# Altium PCB SPItoLVDS.PcbDoc
Units mil, origin at the board's own origin, x right, y up, seen from the top; angles counter-clockwise.
Board outline 1600 x 755 mil, 4 copper layers (L1, L2, L3, L4), stack 64.602 mil thick; 18 components, 22 nets, 115 pads, 31 vias.
Unrouted connection lines stored in the file: 20.
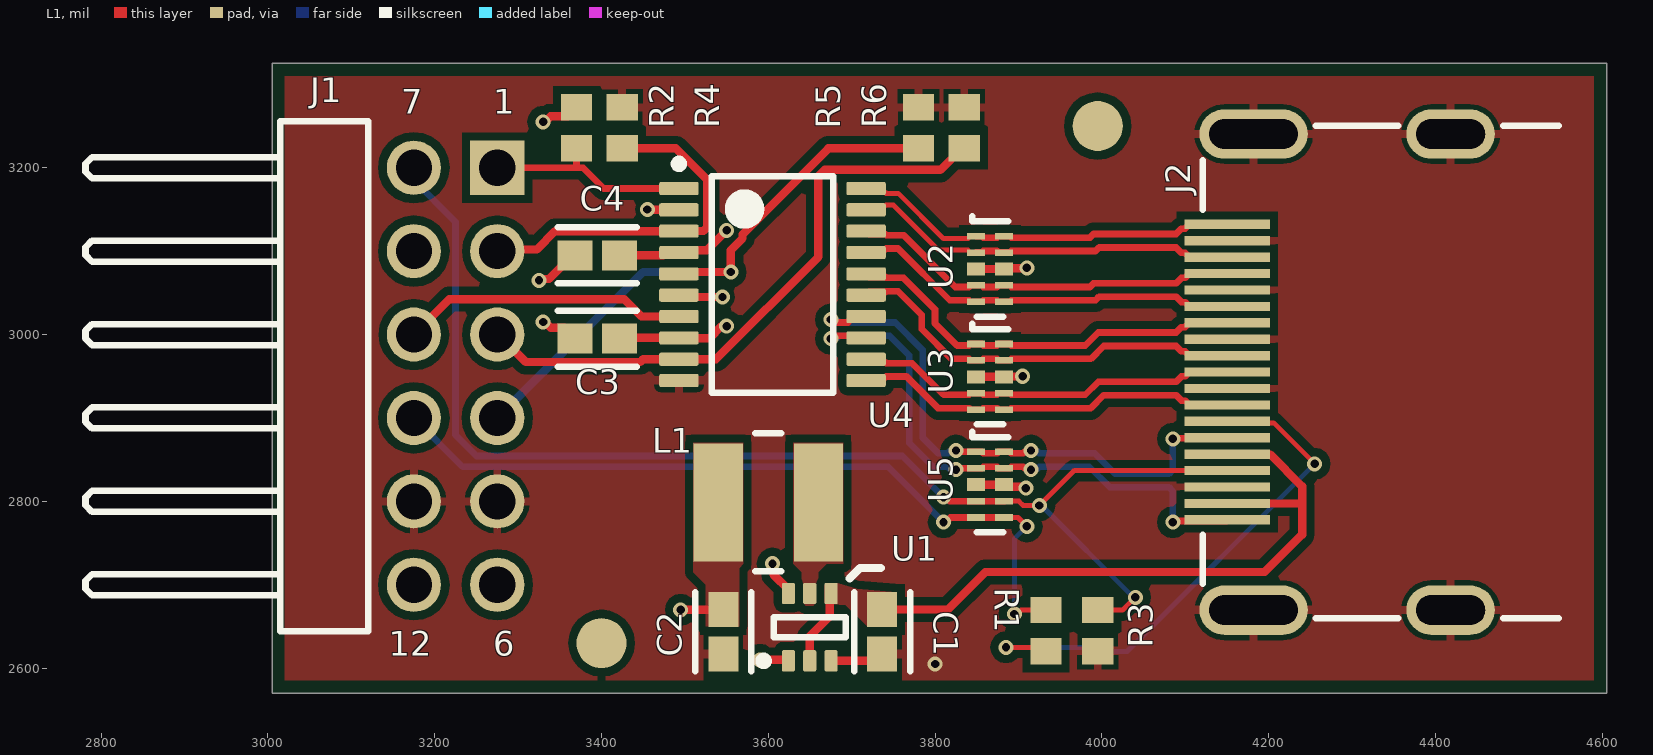
[diagram p0: L1 view]
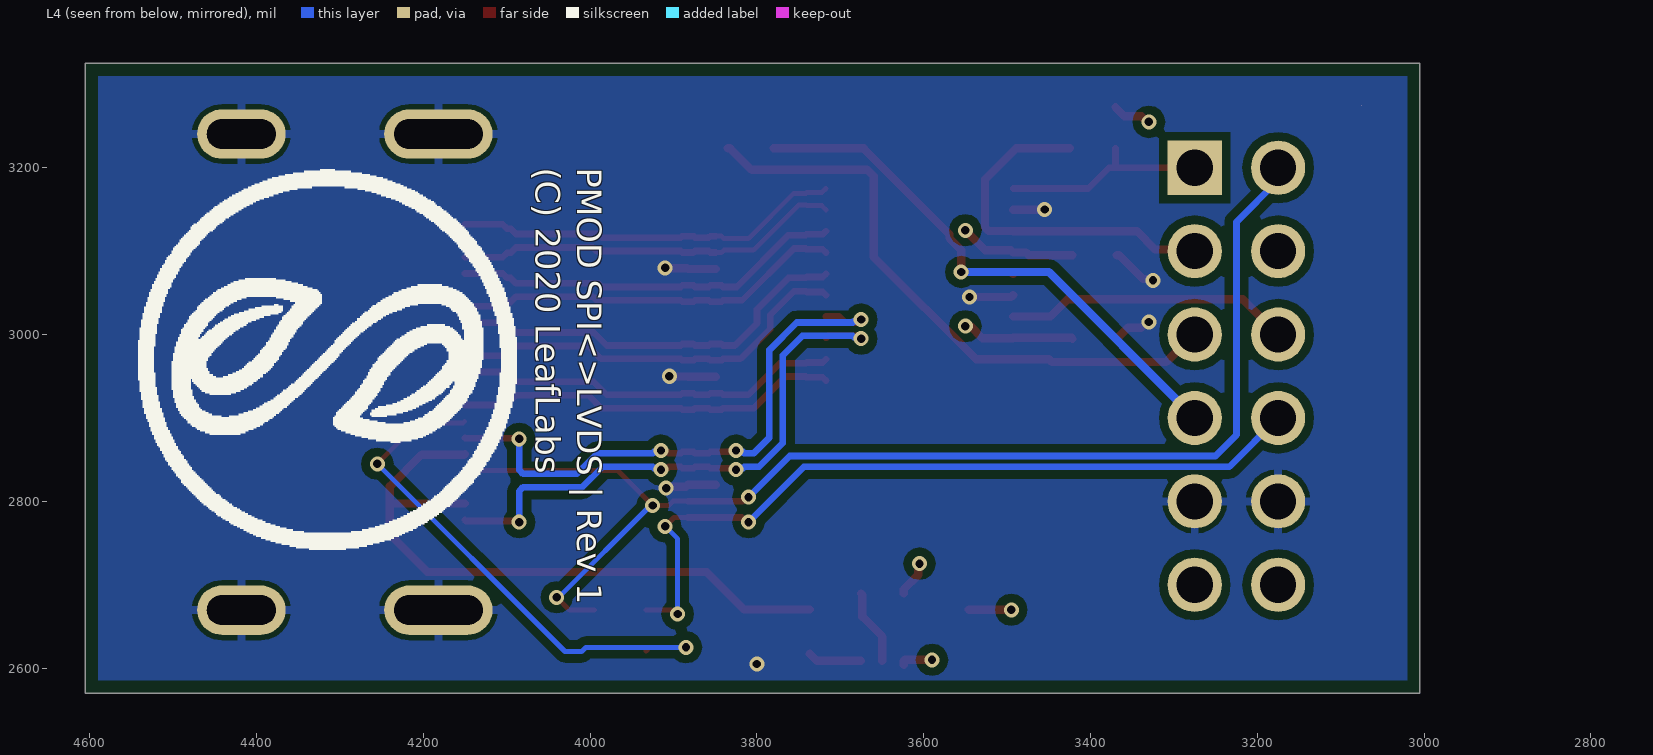
[diagram p1: L4 view, seen from below]
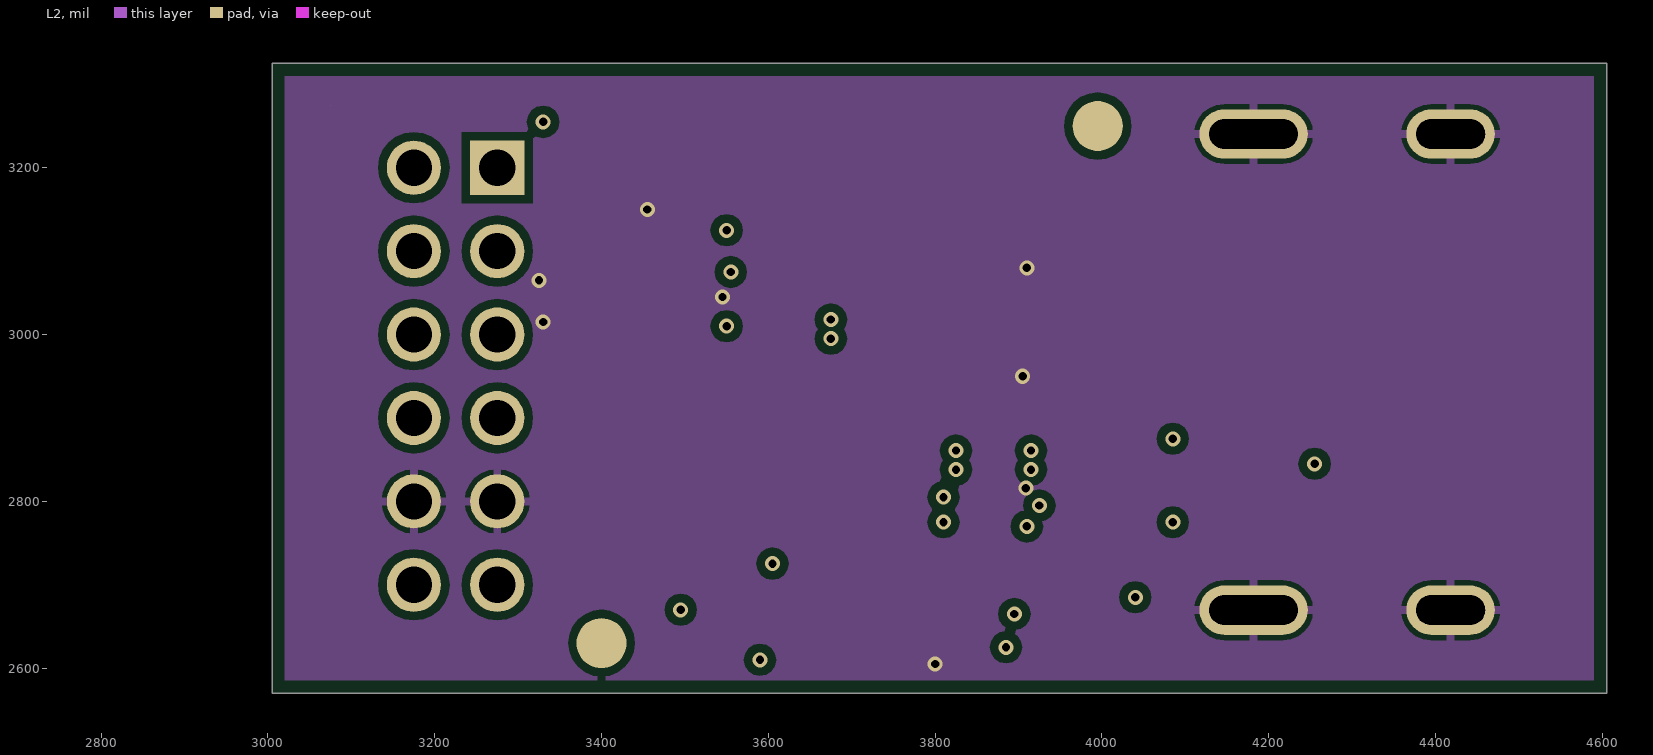
[diagram p2: L2]
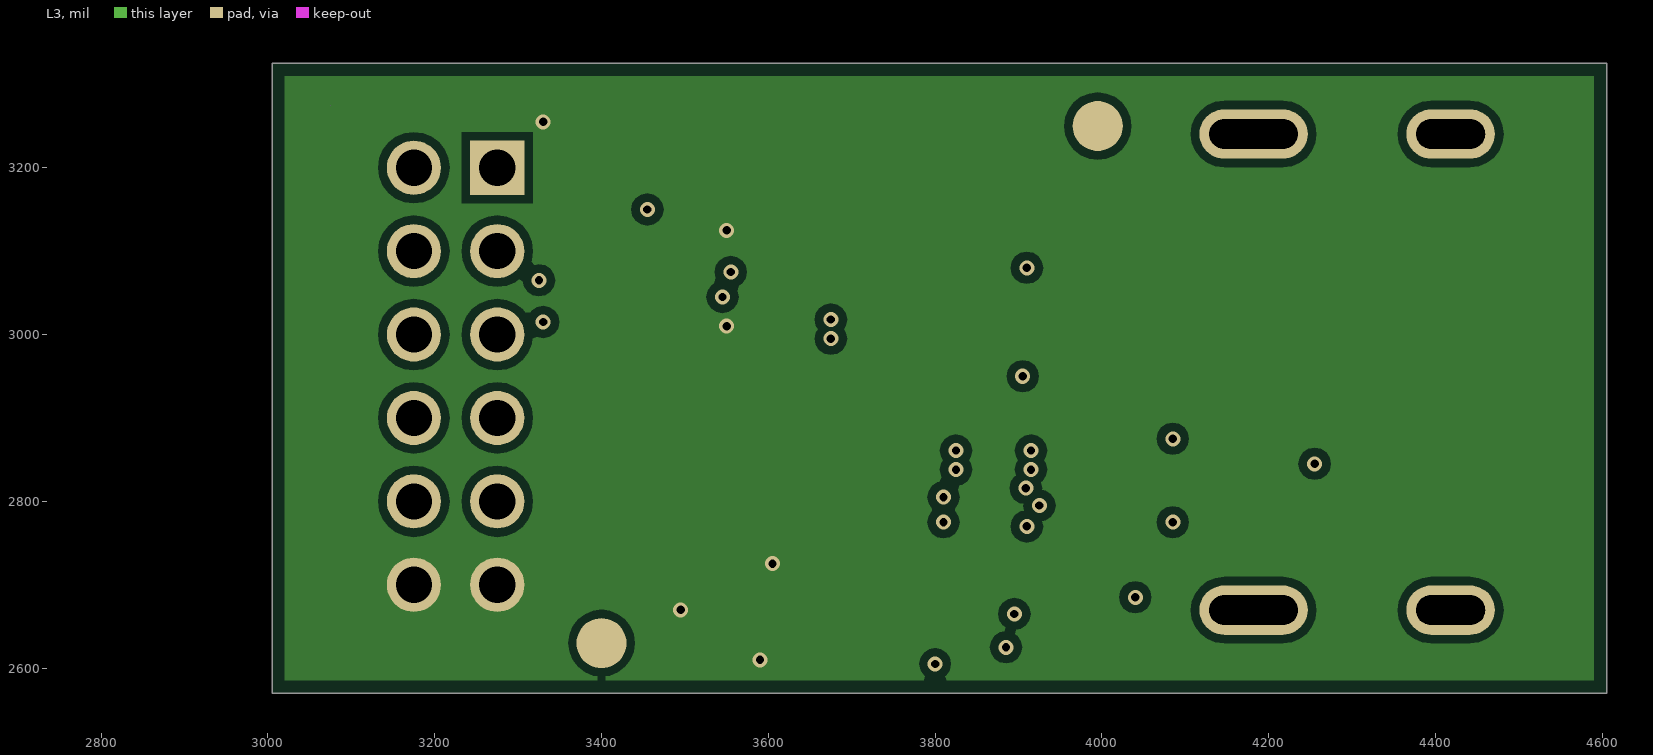
[diagram p3: L3]
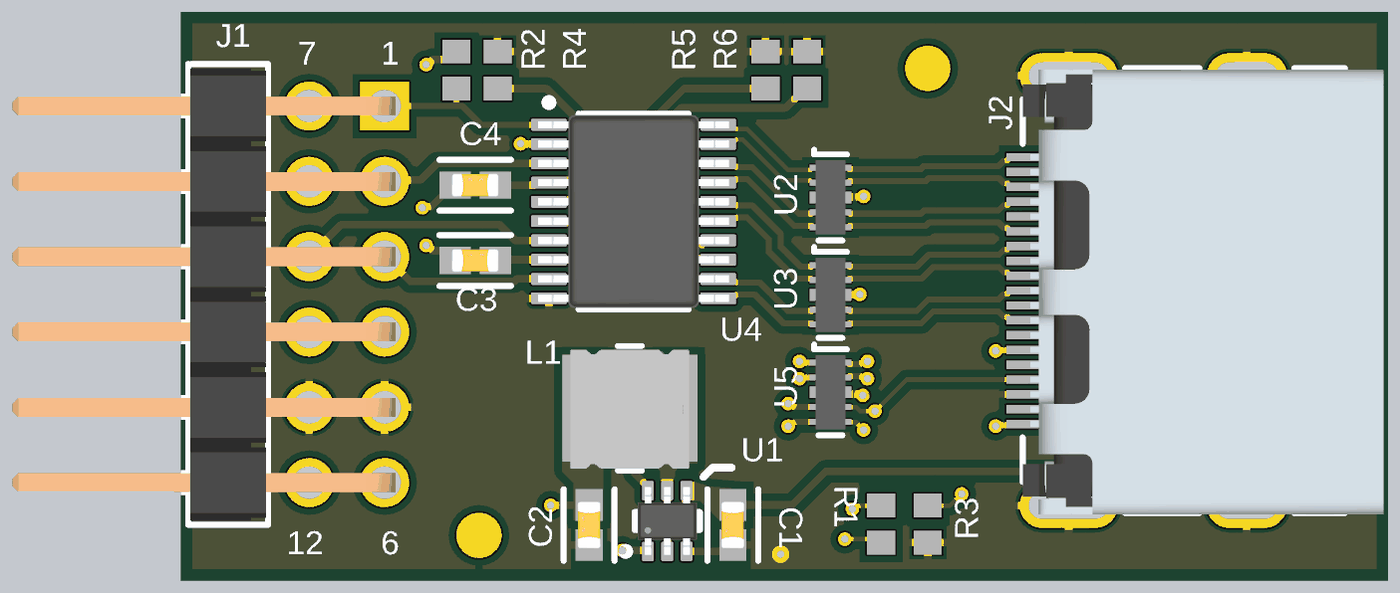
[diagram p4: 3D render of the assembled board from above, using the file's embedded part models]

## Layer stack, top to bottom
Top Solder: solder mask 0.1, Solder Resist, Dk 1
L1: signal copper 1.4
Prepeg1: dielectric 6.7008, FR408, Dk 3.66
L2: signal copper 0.7
Core: dielectric 47, FR-4, Dk 3.66
L3: signal copper 0.7
Prepeg2: dielectric 6.7008, FR408, Dk 3.66
L4: signal copper 1.4
Bottom Solder: solder mask 0.1, Solder Resist, Dk 1

## Board outline
3005,2570 4605,2570 4605,3325 3005,3325
cut-out: 3075,3275

## Design rules (kind name [scope] priority, off if disabled: settings)
BoardOutlineClearance [All] p1: gap=15 ignorepadtopadclearanceinfootprint=FALSE
Clearance "Clearance Polygons" [InPolygon] p1: gap=10 ignorepadtopadclearanceinfootprint=FALSE except(0: Arc-Hole Track-Hole SMDPad-Hole THPad-Hole Via-Hole Fill-Hole Poly-Hole Region-Hole Text-Hole)
Clearance [All] p2: gap=5 ignorepadtopadclearanceinfootprint=FALSE except(0: Arc-Hole Track-Hole SMDPad-Hole THPad-Hole Via-Hole Fill-Hole Poly-Hole Region-Hole Text-Hole)
ComponentClearance "HM-TRP & UFL" [InComponent('X1') vs InComponent('U1')] p1: gap=0 collisioncheckmode=3 verticalgap=0 showdistances=FALSE
ComponentClearance [All] p2: gap=1 collisioncheckmode=3 verticalgap=1 showdistances=FALSE
DiffPairsRouting [All] p1: maxlimit=393.7 minlimit=6 mostfreqgap=8 toplayer_minwidth=6 toplayer_maxwidth=15 toplayer_prefwidth=8 midlayer1_minwidth=6 midlayer1_maxwidth=15 midlayer1_prefwidth=8 midlayer2_minwidth=6 midlayer2_maxwidth=15 midlayer2_prefwidth=8 bottomlayer_minwidth=6 bottomlayer_maxwidth=15 bottomlayer_prefwidth=8 maxuncoupledlength=500
HoleSize [All] p1: absolutevalues=TRUE maxlimit=265 minlimit=10 maxpercent=80.000 minpercent=20.000
HoleToHoleClearance [All] p1: gap=10 allowstackedmicrovias=FALSE
MinimumAnnularRing [All] p1: minimumring=4
MinimumSolderMaskSliver [All] p1: minsoldermaskwidth=0
PlaneClearance [All] p1: clearance=10
PlaneConnect [All] p1: planeconnectstyle=Relief reliefexpansion=4 reliefentries=4 reliefconductorwidth=6 reliefairgap=6
PolygonConnect SMPS_Pours [All vs InNetClass('SMPS_POUR')] p1: connectstyle=Direct reliefconductorwidth=10 reliefentries=4 polygonreliefangle="90 Angle" airgapwidth=6
PolygonConnect "Via connect style" [isVia] p2: connectstyle=Direct reliefconductorwidth=10 reliefentries=4 polygonreliefangle="90 Angle" airgapwidth=10
PolygonConnect [All] p3: connectstyle=Relief reliefconductorwidth=10 reliefentries=4 polygonreliefangle="90 Angle" airgapwidth=6
RoutingCorners [All] p1: cornerstyle=45-Degree minsetback=49.21 maxsetback=49.21
RoutingVias [All] p1: holewidth=12 width=22 viastyle="Through Hole" minholewidth=10 minwidth=18 maxholewidth=100 maxwidth=114
SilkToSilkClearance [All] p1: silktosilkclearance=0
SilkToSolderMaskClearance [IsPad] p1: minsilkscreentomaskgap=5 clearancetoexposedcopper=TRUE
SolderMaskExpansion [All] p1: expansion=2.5 istentingtop=FALSE
Width GND [InNet('GND')] p1: maxlimit=30 minlimit=8 preferedwidth=10 minimp=50.000000 maximp=50.000000 favimp=50.000000
Width Power [InNetClass('Power')] p2: maxlimit=40 minlimit=20 preferedwidth=30
Width 3V3 [InNetClass('3V3')] p3: maxlimit=30 minlimit=10 preferedwidth=20
Width [All] p4: maxlimit=400 minlimit=6 preferedwidth=8
20 further rules are at their usual default settings.

## Classes and differential pairs
net class SMPS_POUR: 3.3V +5 NetL1_2
component class SPItoLVDS: C1 C3 C4 J1 J2 L1 R4 R5 R6 U1 U2 U3 U4 U5
differential pair D3: +D3_P -D3_N
differential pair REFCLK: +REFCLK_P -REFCLK_N
differential pair D2: +D2_P -D2_N
differential pair D1: +D1_P -D1_N
differential pair D0: +D0_P -D0_N

## Components (designator, comment, footprint, x,y, rotation, side; value= is the part's Value field where it differs from the comment)
C1 "10uF" FP-CC0603-DA-IPC_B 3736.51,2643.75 r270 top
C2 "10uF" FP-CC0603-DA-IPC_B 3546.02,2643.75 r270 top
C3 "0.1uF" FP-CC0603-DA-IPC_B 3395,2995 r180 top value="100 nF"
C4 "0.1uF" FP-CC0603-DA-IPC_B 3395,3095 r180 top value="100 nF"
J1 "PMOD" PMOD 3067.52,2950 r270 top
J2 "685119134923" 685119134923 4360,2955 r90 top
L1 "SRN4018-4R7M" FP-SRN4018-MFG 3600,2798.75 r0 top value=4.7uH
R1 "22R" RESC1609X50X30NL10T20 3932.97,2645 r270 top
R2 "4.7k" RESC1609X50X30NL10T20 3370,3247.86 r90 top
R3 "4.7k" RESC1609X50X30NL10T20 3995,2645 r90 top
R4 "4.7k" RESC1609X50X30NL10T20 3424.78,3247.86 r270 top
R5 "4.7k" RESC1609X50X30NL10T20 3780,3247.86 r270 top
R6 "4.7k" RESC1609X50X30NL10T20 3835,3247.86 r270 top
U1 "TPS61222DCKR" SOT363_L 3649.63,2649.12 r90 top
U2 "TPD4E02B04DQAR" DQA0010A 3866,3078.63 r0 top value=Value
U3 "TPD4E02B04DQAR" DQA0010A 3866,2949.32 r0 top value=Value
U4 "SN65LVDT41PW" PW0020A_L 3605,3060 r0 top
U5 "TPD4E02B04DQAR" DQA0010A 3866,2820 r0 top value=Value

## Footprints (in the part's own frame and the unit in brackets; to place one, negate y for a bottom-side part, rotate by r counter-clockwise, add the part's x,y. Pads: shape width x height; smd on the part's side, far side on the other; paste and mask are expansions set on the pad)
685119134923 [mm] "HDMI SMT Horizontal"
  rect 0.28x2.6 smd: 1(4.5,5.325) 2(4,5.325) 3(3.5,5.325) 4(3,5.325) 5(2.5,5.325) 6(2,5.325) 7(1.5,5.325) 8(1,5.325) 9(0.5,5.325) 10(0,5.325) 11(-0.5,5.325) 12(-1,5.325) 13(-1.5,5.325) 14(-2,5.325) 15(-2.5,5.325) 16(-3,5.325) 17(-3.5,5.325) 18(-4,5.325) 19(-4.5,5.325)
  oval 1.5x2.7 hole 0.9 slot 2.1 at 90 deg: Shell(-7.25,-1.475) Shell(7.25,-1.475)
  oval 1.5x3.3 hole 0.9 slot 2.7 at 90 deg: Shell(-7.25,4.525) Shell(7.25,4.525)
  silkscreen extent -7.5,-4.78 7.5,6.07, body extent -7.55,-6.07 7.45,6.08, height 6.17
DQA0010A [mm]
  rect 0.55x0.2 smd paste+0 mask+0.051: 1(-0.425,1) 2(-0.425,0.5) 4(-0.425,-0.5) 5(-0.425,-1) 6(0.425,-1) 7(0.425,-0.5) 9(0.425,0.5) 10(0.425,1)
  rect 0.55x0.4 smd paste+0 mask+0.051: 3(-0.425,0) 8(0.425,0)
  silkscreen extent -0.55,-1.45 0.55,1.61, body extent -0.5,-1.25 0.5,1.25, height 0.55
FP-CC0603-DA-IPC_B [mil]
  rect 41.66x35.91 smd paste+0 mask+0: 1(-26.65,0) 2(26.65,0)
  silkscreen extent -47,-34 47,34, body extent -57,-28 57,28, height 10
FP-SRN4018-MFG [mm]
  rect 1.5x3.6 smd paste+0 mask+0: 1(-1.525,0) 2(1.525,0)
  silkscreen extent -0.4,-2.1 0.4,2.1, body extent -2,-2.03 2,1.97, height 1.64
PMOD [mm] "Pin Header, pitch 2.54 mm, THT, Angled, dual row, 12p"
  rect 1.65x1.65 hole 1.1: 1(-6.35,5.27)
  round 1.65 hole 1.1: 2(-3.81,5.27) 3(-1.27,5.27) 4(1.27,5.27) 5(3.81,5.27) 6(6.35,5.27) 7(-6.35,2.73) 8(-3.81,2.73) 9(-1.27,2.73) 10(1.27,2.73) 11(3.81,2.73) 12(6.35,2.73)
  silkscreen extent -7.77,-7.27 7.77,1.35, body extent -7.62,-7.27 7.62,5.63, height 5.12
PW0020A_L [mm] "SOP, 20-Leads, Body 6.6x4.5mm, Pitch 0.65mm, IPC High Density"
  rrect25% 1.2x0.4 smd: 1(-2.85,2.925) 2(-2.85,2.275) 3(-2.85,1.625) 4(-2.85,0.975) 5(-2.85,0.325) 6(-2.85,-0.325) 7(-2.85,-0.975) 8(-2.85,-1.625) 9(-2.85,-2.275) 10(-2.85,-2.925) 11(2.85,-2.925) 12(2.85,-2.275) 13(2.85,-1.625) 14(2.85,-0.975) 15(2.85,-0.325) 16(2.85,0.325) 17(2.85,0.975) 18(2.85,1.625) 19(2.85,2.275) 20(2.85,2.925)
  silkscreen extent -2.97,-3.3 1.85,3.8, body extent -3.21,-3.25 3.21,3.25, height 1
RESC1609X50X30NL10T20 [mm] "Chip Resistor, 2-Leads, Body 1.55x0.85mm, IPC Medium Density"
  rect 0.8x0.95 smd: 1(-0.625,0) 2(0.625,0)
  body extent -0.82,-0.48 0.82,0.48, height 0.5
SOT363_L [mm] "SOT23, 6-Leads, Body 2.15x1.4mm, Pitch 0.65mm, IPC High Density"
  rrect25% 0.65x0.4 smd: 1(-1.025,0.65) 2(-1.025,0) 3(-1.025,-0.65) 4(1.025,-0.65) 5(1.025,0) 6(1.025,0.65)
  silkscreen extent -1.15,-1.1 0.3,1.52, body extent -1.14,-1 1.14,1, height 0.94

## Part data
C1 C2: library part CAP-0603-10uF, "CAP CER 10UF 0603", Supplier Part Number 1=490-12736-1-ND, Category=Cap, ComponentLink2Description=Datasheet, ComponentLink2URL=http://www.yageo.com/documents/recent/UPY-GPHC_X7R_6.3V-to-50V_18.pdf, Device Class L2=Capacitors, Supplier 1=Digi-Key
C3 C4: library part CAP-0603-0.1UF, "CAP CER 0.1UF 16V X7R 0603", Capacitance="100 nF", Manufacturer=YAGEO, Manufacturer Part Number=CC0603KRX7R7BB104, Package=CC0603-DA, Supplier Part Number 1=311-1088-1-ND, Temperature="-55°C to +125°C", Temperature Characteristic=X7R, Temperature Coefficient=15%, Temperature Range High=+125°C, Temperature Range Low=-55°C, Tolerance=0.1, Voltage="16 V", Automotive=No, Category=Cap, ComponentLink2Description=Datasheet, ComponentLink2URL=http://www.yageo.com/documents/recent/UPY-GPHC_X7R_6.3V-to-50V_18.pdf, Device Class L1="Passive Components", Device Class L2=Capacitors, Device Class L3="Ceramic Capacitors", Digikey Description="CAP CER 0.1UF 16V X7R 0603", Footprint Url=http://www.yageo.com/exep/pages/download/literatures/UPY-C_GEN_24.pdf, Height=0.9mm, Lead Free=Yes, Material=Ceramic, Mouser Description="Multilayer Ceramic Capacitor, CC Series, 0.1 - F, - 10%, X7R, 16 V, 0603 [1608 Metric]", Octopart=https://octopart.com/cc0603krx7r7bb104-yageo-192941, RoHS=TRUE, Supplier 1=Digi-Key, Voltage Rating="16 V"
J1: library part PMOD-TH, "PMOD Connector, Through Hole, Standard pinout", Contact Resistance=20mOhm, Rated Current=3A, Supplier Part Number 1=732-5354-ND, Withstanding Voltage=500VAC, Gender=Male, Orientation=Angled, Pin Number=12, Pitch=2.54mm, Publisher=WurthElektronik, Row Number=Dual, Supplier 1=Digi-Key
J2: "HDMI Type A Receptacle WR-HDMI, Horizontal, SMT", Contact Resistance=30mOhm, Manufacturer="Wurth Elektronik", Operating Temperature=-20to85degC, Rated Current=0.5A, Supplier Part Number 1=732-2737-1-ND, Working Voltage=40VDC, Connector Type=HDMITypeA, Datasheet URL=https://katalog.we-online.de/em/datasheet/685119134923.pdf, Gender=Receptacle, Manufacturer URL=http://www.we-online.de, Mounting Technology=SMT, Orientation=Horizontal, Package Reference=685119134923, Packaging=TapeandReel, Part Number=685119134923, Publisher=WurthElektronik, Supplier 1=Digi-Key
L1: "FIXED IND 4.7UH 1.9A 84 MOHM SMD", Inductance=4.7uH, Manufacturer=Bourns, Package=SRN4018, Rms Current=1.9A, Saturation Current=2A, Self Resonant Frequency=35MHz, Series Resistance=0.084Ω, Supplier Part Number 1=SRN4018-4R7MCT-ND, Temperature="-40°C to +125°C", Temperature Range High=+125°C, Temperature Range Low=-40°C, Test Frequency=7.96MHz, Tolerance=20%, Automotive=No, Category=Ind, ComponentLink2Description=Datasheet, ComponentLink2URL=https://www.bourns.com/docs/Product-Datasheets/SRN4018.pdf, Composition=Wirewound, Core Material=Ferrite, Device Class L1="Passive Components", Device Class L2=Inductors, Device Class L3="Fixed Inductors", Digikey Description="FIXED IND 4.7UH 1.9A 84 MOHM SMD", Height=1.8mm, Lead Free=Yes, Manufacturer Part Number=SRN4018-4R7M, Mouser Description="Fixed Inductors 4.7uH 20% SMD 4018", Octopart=https://octopart.com/srn4018-4r7m-bourns-25452396, Q Factor=9, RoHS=TRUE, Shielding=true, Supplier 1=Digi-Key
R1: library part RES-0603-22R, "Resistor 0603 22 Ohm", Supplier Part Number 1=CR0603-JW-220ELFCT-ND, Supplier 1=Digi-Key
R2 R3 R4 R5 R6: library part RES-0603-4.7k, "Resistor 0603 4.7k Ohm", Supplier Part Number 1=CR0603-JW-472ELFCT-ND, Supplier 1=Digi-Key
U1: "Boost Voltage Converter with 0.7 to 5.5 V Input and 5 V Output, -40 to 85 degC, 6-Pin SC70 (DCK), Green (RoHS & no Sb/Br)", Manufacturer="Texas Instruments", Supplier Part Number 1=296-39435-1-ND, Switching Frequency(Max)(kHz)=2000, Code_JEDEC=MO-203-AB, ComponentLink1Description=Datasheet, ComponentLink1URL=http://www.ti.com/general/docs/lit/getliterature.tsp?genericPartNumber=TPS61222&fileType=pdf, ComponentLink2Description="Package Specification", ComponentLink2URL=http://www.ti.com/litv/pdf/mpds114c, DatasheetVersion=SLVS776, Eco-Plan="Green (RoHS & no Sb/Br)", Mounting Technology="Surface Mount", PackageDescription="6-Pin Plastic Small-Outline Package, 2 x 1.3 mm Body, 0.65 mm Pitch, 2.1 mm Lead Span", PackageReference=DCK0006A, PackageVersion="revG, Jan-2007", PartNumber=TPS61222DCKR, Regulated Outputs(#)=1, SubFamily="Step-Up Regulator", Supplier 1=Digi-Key, Topology=Boost, Vin(Max)(V)=5.5, Vin(Min)(V)=0.7, Vout(Max)(V)=5, Vout(Min)(V)=5
U2 U3 U5: "4 Channel TVS Avalanch diode for USB3/HDMI2.0 protection", Manufacturer="Texas Instruments", Supplier Part Number 1=296-43875-1-ND, CompType=IC, Copyright="Copyright (C) 2018 Accelerated Designs. All rights reserved", MountType=SMT, PackageReference=DQA0010A, Part Number=TPD4E02B04DQAR, PartNumber=TPD4E02B04DQAR, PIN_COUNT=10, RefDes=RefDes, RoHS=Y, Supplier 1=Digi-Key, Type=DEV
U4: "SPI<>LVDS Transceiver Interconnect Extender Chipset, -40 to +125 degC, 20-Pin TSSOP (PW), Green (RoHS & no Sb/Br)", Manufacturer="Texas Instruments", Supplier Part Number 1=296-12738-5-ND, ComponentLink1Description="Manufacturer URL", ComponentLink1URL=http://www.ti.com/, ComponentLink2Description=Datasheet, ComponentLink2URL=http://www.ti.com/general/docs/lit/getliterature.tsp?genericPartNumber=SN65LVDT41-EP&fileType=pdf, ComponentLink3Description="URL Link1", ComponentLink3URL=SamplesURL:http://www.ti.com/product/sn65lvdt41-ep#samples, DatasheetVersion=SCES633, Eco-Plan="Green (RoHS & no Sb/Br)", Mounting Technology="Surface Mount", PackageDescription="20-Pin Plastic Thin Small Outline Package 6.5 x 4.4 mm Body ,0.65 mm Pitch", PackageReference=PW0020A, Part Number=SN65LVDT41PW, SubFamily="LVDS PHY (<800Mbps)", Supplier 1=Digi-Key

## Free pads (board coordinates)
  round 60 / inner round 60 / far side round 0 all layers, no hole: FIDUCIAL(3400,2630) FIDUCIAL(3995,3250)

## Via types
v1: diameter 18, hole 10, L1 to L4, 31 vias

## Nets (pads, with @x,y where several pads share a name; then routed paths per layer and width w, separated by ;. In a path a pad name is that pad's centre, name@x,y a point inside that pad or via, vN(x,y) a via of type N, cw(c..) or ccw(c..) an arc to the next point about the centre after c; other vN are vias at no path point)
3.3V: C2.1 C3.1 C4.1 J1.6 J1.12 L1.1 R2.2 U1.1 U1.6 U4.4 U4.8 | length 457.4
  L1 w10: v1(3330,3255) 3332.16,3255 3338.88,3261.72 3359.25,3261.72 R2.2 ; C3.1 3422.68,2996.02 U4.8 3493.31,2995.51 3529.49,2995.51 3543.98,3010 v1(3550,3010) ; C4.1 3473.66,3095 3477.05,3098.39 U4.4 3495.65,3101.24 3526.24,3101.24 v1(3550,3125) ; v1(3495,2670) 3545.61,2670 C2.1 ; v1(3590,2610) 3622.81,2610 U1.1 U1.1@3624.04,2603.85 ; v1(3605,2725.37) 3606.53,2723.84 3606.53,2711.91 3624.04,2694.4 U1.6
+5: C1.1 J2.15 J2.18 U1.2 U1.4 | length 886.3
  L1 w10: U1.2 3649.63,2637.76 3673.55,2661.68 3673.55,2687.8 U1.4 ; C1.1 3815.41,2670.41 3860.2,2715.2 4195.2,2715.2 4240,2760 4240,2800 ; J2.18 4237.52,2797.52 4240,2800 ; J2.15 4150.87,2856.06 4202.02,2856.06 4240,2818.08 4240,2800
D0_N: J2.3 U2.2 U2.9 U4.19 | length 468.1
  L1 w6: U4.19 3722.08,3154.44 3740.42,3154.44 3741.34,3155.36 3749.83,3155.36 3804.03,3101.16 3839.54,3101.16 3842.38,3098.32 U2.2
  L1 w8: U2.2 3856.03,3098.32 3857.87,3100.16 3874.13,3100.16 3875.97,3098.32 U2.9 3889.5,3098.32 3891.34,3100.16 3992.29,3100.16 3996.61,3104.48 4088.93,3104.48 4095.45,3097.97 4099.51,3097.97 4104.69,3092.8 J2.3
D0_P: J2.1 U2.1 U2.10 U4.20 | length 468.1
  L1 w6: U4.20 3722.08,3170.28 3740.42,3170.28 3741.34,3169.36 3755.62,3169.36 3809.82,3115.16 3839.54,3115.16 3842.38,3118 U2.1
  L1 w8: U2.1 3856.03,3118 3857.87,3116.16 3874.13,3116.16 3875.97,3118 U2.10 3889.5,3118 3891.34,3116.16 3985.67,3116.16 3989.99,3120.48 4088.93,3120.48 4095.45,3126.99 4099.51,3126.99 4104.69,3132.17 J2.1
D1_N: J2.6 U2.5 U2.6 U4.17 | length 470.5
  L1 w8: U4.17 3721.08,3102.26 3740.59,3102.26 3741.51,3103.18 3755.48,3103.18 3817.55,3041.11 3840.66,3041.11 3842.5,3039.26 U2.5 3856.03,3039.26 3857.87,3041.11 3874.13,3041.11 3875.97,3039.26 U2.6 3889.5,3039.26 3891.34,3041.11 3992.29,3041.11 3996.61,3045.43 4088.93,3045.43 4095.45,3038.91 4099.51,3038.91 4104.69,3033.74 J2.6
D1_P: J2.4 U2.4 U2.7 U4.18 | length 470.5
  L1 w8: U4.18 3721.08,3120.1 3740.59,3120.1 3741.51,3119.18 3762.11,3119.18 3824.18,3057.11 3840.66,3057.11 3842.5,3058.95 U2.4 3856.03,3058.95 3857.87,3057.11 3874.13,3057.11 3875.97,3058.95 U2.7 3889.5,3058.95 3891.34,3057.11 3985.67,3057.11 3989.99,3061.43 4088.93,3061.43 4095.45,3067.94 4099.51,3067.94 4104.69,3073.11 J2.4
D2_N: J2.9 U3.2 U3.9 U4.15 | length 492.9
  L1 w8: U4.15 3721.08,3051.08 3740.59,3051.08 3741.51,3052 3755.48,3052 3783.93,3023.55 3783.93,3006.73 3819.81,2970.84 3840.66,2970.84 3842.5,2969 U3.2 3856.03,2969 3857.87,2970.84 3874.13,2970.84 3875.97,2969 U3.9 3889.5,2969 3891.34,2970.84 3986.69,2970.84 4002.22,2986.37 4088.93,2986.37 4095.45,2979.86 4099.51,2979.86 4104.69,2974.69 J2.9
D2_P: J2.7 U3.1 U3.10 U4.16 | length 492.9
  L1 w8: U4.16 3721.08,3068.92 3740.59,3068.92 3741.51,3068 3762.11,3068 3799.93,3030.18 3799.93,3013.36 3826.44,2986.84 3840.66,2986.84 3842.5,2988.69 U3.1 3856.03,2988.69 3857.87,2986.84 3874.13,2986.84 3875.97,2988.69 U3.10 3889.5,2988.69 3891.34,2986.84 3980.06,2986.84 3995.59,3002.37 4088.93,3002.37 4095.45,3008.88 4099.51,3008.88 4104.69,3014.06 J2.7
D3_N: J2.12 U3.5 U3.6 U4.11 | length 465.1
  L1 w8: U4.11 3721.08,2948.72 3740.59,2948.72 3741.51,2949.64 3765.68,2949.64 3803.53,2911.79 3840.66,2911.79 3842.5,2909.95 U3.5 3856.03,2909.95 3857.87,2911.79 3874.13,2911.79 3875.97,2909.95 U3.6 3889.5,2909.95 3891.34,2911.79 3986.69,2911.79 4002.22,2927.32 4088.93,2927.32 4095.45,2920.8 4099.51,2920.8 4104.69,2915.63 J2.12
D3_P: J2.10 U3.4 U3.7 U4.12 | length 465.1
  L1 w8: U4.12 3721.08,2966.56 3740.59,2966.56 3741.51,2965.64 3772.31,2965.64 3810.16,2927.79 3840.66,2927.79 3842.5,2929.63 U3.4 3856.03,2929.63 3857.87,2927.79 3874.13,2927.79 3875.97,2929.63 U3.7 3889.5,2929.63 3891.34,2927.79 3980.06,2927.79 3995.59,2943.32 4088.93,2943.32 4095.45,2949.83 4099.51,2949.83 4104.69,2955 J2.10
FSYNC: J1.10 R1.1 U5.5 U5.6 | length 944.6
  L1 w6: U5.6 3899.37,2780.63 v1(3910,2770) ; v1(3895,2665) 3898.25,2665 3902.85,2669.61 R1.1
  L1 w8: v1(3810,2775) 3812.71,2775 3818.34,2780.63 U5.5 U5.6
  L4 w6: v1(3895,2665) 3895,2755 v1(3910,2770)
  L4 w8: J1.10 3233.52,2841.48 3743.52,2841.48 v1(3810,2775)
GND: C1.2 C2.2 C3.2 C4.2 J1.5 J1.11 J2.2 J2.5 J2.8 J2.11 J2.17 J2.Shell R3.1 R4.1 R5.1 R6.1 U1.3 U2.3 U2.8 U3.3 U3.8 U4.2 U4.6 U4.10 U5.3 U5.8 | length 436.8
  L1 w10: v1(3325,3065) 3326.53,3066.53 3337,3066.53 3365.47,3095 C4.2 ; v1(3330,3015) 3332.16,3015 3339.21,3007.96 3355.39,3007.96 C3.2 ; v1(3455,3150) 3455.22,3149.78 3492.58,3149.78 U4.2 ; U4.6 3495,3045 v1(3545,3045) ; U1.3 3728.17,2608.77 C1.2 ; U5.3 U5.8 3885.34,2817.39 3907.32,2817.39 v1(3908.85,2815.86) ; U3.3 U3.8 3883.07,2949.66 3904.66,2949.66 v1(3905,2950) ; U2.3 U2.8 3883.41,3079.32 3909.32,3079.32 v1(3910,3080)
  other v1: 3800,2605
NetJ2_13: J2.13 R1.2 | length 640.9
  L1 w6: v1(3885,2625) 3928.36,2625 R1.2 ; J2.13 4152.22,2894.08 4205.92,2894.08 v1(4255,2845)
  L4 w6: v1(3885,2625) 4005,2625 4010,2620 4030,2620 v1(4255,2845)
NetL1_2: L1.2 U1.5
REFCLK: J1.9 U4.7 | length 344
  L1 w10: J1.9 3217.48,3042.48 3427.1,3042.48 3447.97,3021.61 U4.7
REFCLK_N: J2.19 U4.13 U5.2 U5.9 | length 706
  L1 w8: v1(3675,2995) 3677.71,2995 3681.21,2998.5 3714.73,2998.5 U4.13 ; v1(3825,2838.03) 3826.59,2839.62 3849.2,2839.62 U5.2 3856.03,2839.69 3857.87,2841.53 3874.13,2841.53 3875.97,2839.69 U5.9 3889.5,2839.69 3891.34,2841.53 3905.56,2841.53 3907.15,2839.94 3913.09,2839.94 v1(3915,2838.03) ; v1(4085,2775) 4086.42,2776.42 4148.94,2776.42 J2.19
  L4 w8: v1(3675,2995) 3676.91,2996.91 3683.61,2996.91 3685.2,2998.5 3745.5,2998.5 3769,2975 3769,2869.9 3797.37,2841.53 3814.8,2841.53 3816.39,2839.94 3823.09,2839.94 v1(3825,2838.03) ; v1(3915,2838.03) 3916.91,2839.94 3923.61,2839.94 3925.2,2841.53 3984.84,2841.53 4009.36,2817 4080.31,2817 4085,2812.31 v1(4085,2775)
REFCLK_P: J2.14 U4.14 U5.1 U5.10 | length 708.2
  L1 w8: v1(3675,3018) 3677.71,3018 3681.21,3014.5 3696,3014.5 3696,3016.16 3701.46,3021.61 U4.14 ; v1(3825,2861.03) 3826.59,2859.43 3849.2,2859.43 U5.1 3856.03,2859.37 3857.87,2857.53 3874.13,2857.53 3875.97,2859.37 U5.10 3889.5,2859.37 3891.34,2857.53 3905.56,2857.53 3907.15,2859.11 3913.09,2859.11 v1(3915,2861.03) ; v1(4085,2875) 4085.63,2875.63 4149.73,2875.63 J2.14
  L4 w8: v1(3675,3018) 3676.91,3016.09 3683.61,3016.09 3685.2,3014.5 3752.13,3014.5 3785,2981.63 3785,2876.53 3804,2857.53 3814.8,2857.53 3816.39,2859.11 3823.09,2859.11 v1(3825,2861.03) ; v1(3915,2861.03) 3916.91,2859.11 3923.61,2859.11 3925.2,2857.53 3991.46,2857.53 4015.99,2833 4080.31,2833 4085,2837.69 v1(4085,2875)
SPI_CS: J1.1 R2.1 U4.1 | length 246.3
  L1 w8: J1.1 3377.84,3200 3402.69,3175.16 U4.1 ; 3370,3205 R2.1
SPI_INT: J1.7 J2.16 R3.2 U5.4 U5.7 | length 1530.7
  L1 w6: U5.7 3900.36,2800.32 3905.68,2795 v1(3925,2795) 3966.89,2836.89 J2.16 ; R3.2 4024.61,2669.61 v1(4040,2685)
  L1 w8: v1(3810,2805) 3812.71,2805 3817.39,2800.32 U5.4 U5.7
  L4 w6: v1(3925,2795) 3927.5,2795 4037.5,2685 v1(4040,2685)
  L4 w8: J1.7 3175,3185 3225,3135 3225,2879.69 3250.21,2854.48 3760.52,2854.48 v1(3810,2805)
SPI_MISO: J1.3 R6.2 U4.9 | length 736.5
  L1 w10: J1.3 3276.24,3000 3309.19,2967.04 3446.62,2967.04 3450.01,2970.43 U4.9 3537.3,2970.43 3660,3093.13 3660,3190 3667.51,3197.51 3806.3,3197.51 3832.05,3223.25 R6.2
SPI_MOSI: J1.2 R4.2 U4.3 | length 437.9
  L1 w10: J1.2 3277.06,3102.06 3322.48,3102.06 3344.4,3123.98 U4.3 3492.98,3124.16 3522.29,3124.16 3526.42,3128.29 3526.42,3186.02 3489.18,3223.25 R4.2
SPI_SCK: J1.4 R5.2 U4.5 | length 720.3
  L1 w10: U4.5 3495,3075 v1(3555,3075) 3555,3101.27 3569,3115.27 3569,3120.21 3672.04,3223.25 R5.2
  L4 w10: J1.4 3450,3075 v1(3555,3075)
pads on no net: J1.8

## Polygon pours and split planes (outlines as drawn)
GND on L1 "GND_L01_P016" (solid, pour order 16): 3005,3325 4605,3325 4605,2570 4600,2565 3005,2565
+5 on L1 "+5_L01_P015" (solid, pour order 15): 3666.76,2701.74 3666.76,2677.17 3693.1,2675.4 3718.98,2649.52 3754.04,2649.52 3754.04,2690.9 3706.31,2695 3683.75,2701.74
3.3V on L1 "3.3V_L01_P013" (solid, pour order 13): 3510,2870 3570,2870 3570,2725 3565,2720 3565,2650 3525,2650 3525,2700 3510,2715
NetL1_2 on L1 "NETL1_2_L01_P010" (solid, pour order 10): 3690,2870 3630,2870 3630,2725 3640,2715 3640,2675 3660,2675 3660,2715 3670,2725 3690,2725
3.3V on L1 "3.3V_L01_P011" (solid, pour order 11): 3455,2735
3.3V on L3 "3.3V_L03_P003" (solid, pour order 3): 3005,2570 4605,2570 4605,3325 3005,3325
GND on L2 "GND_L02_P002" (solid, pour order 2): 3005,3325 4605,3325 4605,2570 3005,2570
GND on L4 "GND_L04_P006" (solid, pour order 6): 4605,3325 3005.03,3325 3000,2570 4605,2570

## Silkscreen, mask and mechanical layers (free items; w line width, h text height)
Top Overlay:
  lines w10: 3697.5,2707.5 3710,2720 3735,2720
Bottom Overlay:
  drawing of 2 lines, arcs and shapes, not listed
  text "PMOD SPI<>LVDS | Rev 1 / (C) 2020 LeafLabs" at 4075,3200 h50 r90
Mechanical 1:
  the board outline again, w10

## Text inside footprints (layer, text, board x,y; h text height)
J1: Top Overlay "1" at 3270,3255 h50; Top Overlay "7" at 3160,3255 h50; Top Overlay "12" at 3145,2605 h50; Top Overlay "6" at 3270,2605 h50
J2: Top 3D Body "PCB Edge" at 4596.5,2876.7 h50 r90